# EAGLE board ATTINY Reed switch (EAGLE 7.7.0)
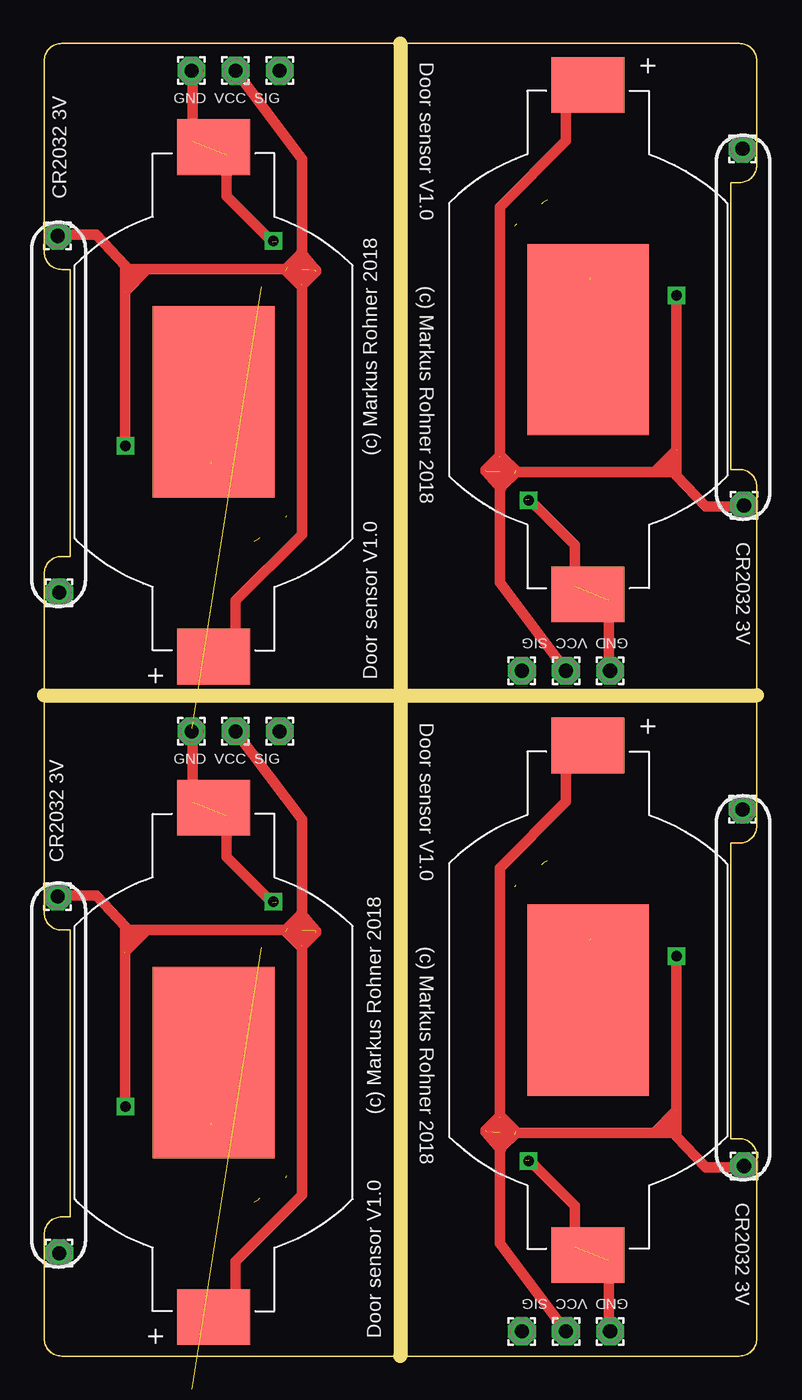
[diagram p0: board, top side]
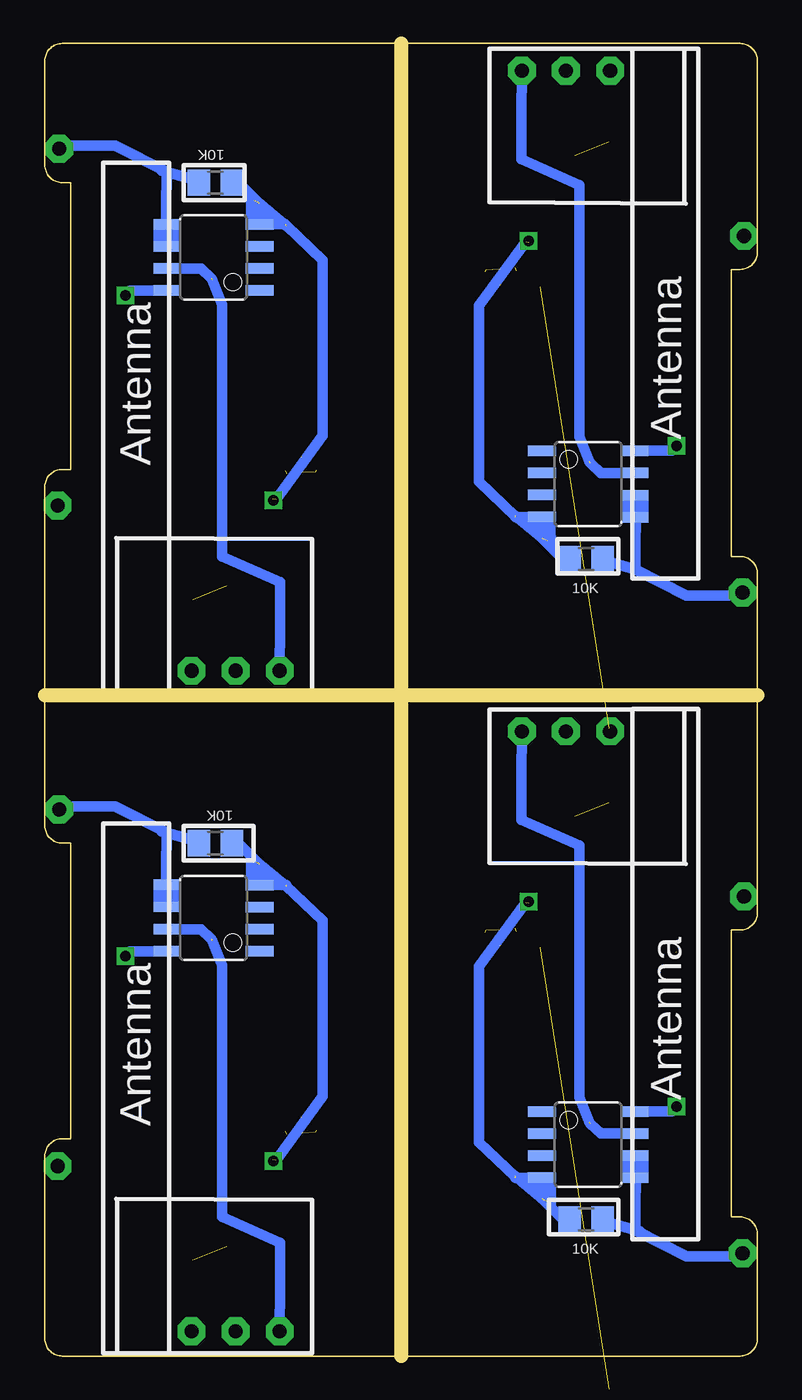
[diagram p1: board, bottom side, seen from below]

Size 41 x 75.5 mm. Coordinates in mm from the lower left corner, seen from the top.
Outline: 0,38 0,45 arc-90 1,46 1.5,46 1.5,62.5 1,62.5 arc-90 0,63.5 0,74.5 arc-90 1,75.5 20.5,75.5
Outline: 0,38 0,25.5 arc90 1,24.5 1.5,24.5 1.5,8 1,8 arc90 0,7 0,1 arc90 1,0 20.5,0
Outline: 20.5,75.5 40,75.5 arc-90 41,74.5 41,68.5 arc-90 40,67.5 39.5,67.5 39.5,51 40,51 arc-90 41,50 41,38
Outline: 41,38 41,30.5 arc-90 40,29.5 39.5,29.5 39.5,12.5 40,12.5 arc-90 41,11.5 41,1 arc-90 40,0 20.5,0
Outline: 0,38 41,38
Outline: 20.5,75.5 20.5,0
Copper layers (1*16): Top 0.035mm / dielectric 1.5mm / Bottom 0.035mm
Design rules "default": minimum track width 10mil, minimum drill 24mil, track to track 8mil, track to pad 8mil, pad to pad 8mil, via to via 8mil, smd to smd 8mil, copper to edge 40mil, drill to drill 8mil, minimum pad ring 10mil, minimum via ring 8mil, stop-mask expansion 4mil, vias tented up to drill 0mil, thermal gap 10mil

## Footprints (pad centres in the part's own frame; a part is rotated, then mirrored left to right if it is on the bottom)
8S1 = smd 0.6 x 1.6: 1 -1.905,-2.654; 2 -0.645,-2.654; 3 0.625,-2.654; 4 1.895,-2.654; 5 1.905,2.654; 6 0.635,2.654; 7 -0.635,2.654; 8 -1.905,2.654
BAT_BU2032SM-BT-GTR = smd 3.2 x 4.2: 1 -14.65,0; 2 14.65,0 | smd 11 x 7: 3 0,0
MK6-8-A = drill 0.6 pad 1.016: 1 -10.16,0; 2 10.16,0
R0805 = smd 1.3 x 1.5: 1 -0.95,0; 2 0.95,0
1,6/0,8 = drill 0.813 pad 1.6 octagon: 1 0,0

## Placement (x,y rotation side)
E$1  [8S1]  9.74,12.16 270 bottom
E$2  [BAT_BU2032SM-BT-GTR]  9.74,16.88 90 top
E$3  [MK6-8-A]  0.83,16.17 90 top
E$4  [R0805]  9.85,7.85 0 bottom
E$5  [1,6/0,8]  13.55,35.93 0 top
E$6  [1,6/0,8]  0.77,26.43 0 top
E$7  [1,6/0,8]  8.47,35.93 0 top
E$8  [1,6/0,8]  11.01,35.93 0 top
E$9  [1,6/0,8]  0.86,5.91 0 top
E$10  [8S1]  31.29,63.2 90 bottom
E$11  [BAT_BU2032SM-BT-GTR]  31.29,58.47 270 top
E$12  [MK6-8-A]  40.21,59.18 270 top
E$13  [R0805]  31.18,67.5 180 bottom
E$14  [1,6/0,8]  32.56,39.42 180 top
E$15  [1,6/0,8]  30.02,39.42 180 top
E$16  [1,6/0,8]  27.48,39.42 180 top
E$17  [1,6/0,8]  40.27,48.92 180 top
E$18  [1,6/0,8]  40.18,69.44 180 top
E$37  [8S1]  9.74,50.16 270 bottom
E$38  [BAT_BU2032SM-BT-GTR]  9.74,54.88 90 top
E$39  [MK6-8-A]  0.83,54.17 90 top
E$40  [R0805]  9.85,45.85 0 bottom
E$41  [1,6/0,8]  8.47,73.93 0 top
E$42  [1,6/0,8]  11.01,73.93 0 top
E$43  [1,6/0,8]  13.55,73.93 0 top
E$44  [1,6/0,8]  0.77,64.43 0 top
E$45  [1,6/0,8]  0.86,43.91 0 top
E$46  [8S1]  31.29,25.2 90 bottom
E$47  [BAT_BU2032SM-BT-GTR]  31.29,20.47 270 top
E$48  [MK6-8-A]  40.21,21.18 270 top
E$49  [R0805]  31.18,29.5 180 bottom
E$50  [1,6/0,8]  32.56,1.42 180 top
E$51  [1,6/0,8]  30.02,1.42 180 top
E$52  [1,6/0,8]  27.48,1.42 180 top
E$53  [1,6/0,8]  40.27,10.92 180 top
E$54  [1,6/0,8]  40.18,31.44 180 top

## Library data of the parts
E$1 E$10 E$37 E$46 = atmel
E$2 E$11 E$38 E$47 = BU2032SM-BT-GTR
E$3 E$12 E$39 E$48 = switch-reed
E$4 E$13 E$40 E$49 = eagle-ltspice
E$5-E$9 E$14-E$18 E$41-E$45 E$50-E$54 = wirepad

## Nets
S$14: E$5.1
S$24: E$16.1
S$69: E$43.1
S$84: E$52.1
VCC: E$8.1
VCC1: E$15.1
VCC4: E$42.1
VCC5: E$51.1

## Tracks (layer width: path | path; a pad name or v marks a point on that pad's centre or on a via)
GND  (7 unrouted)
  Top 0.61: 13.13,26.06 10.49,28.7 10.49,31.07 | 8.51,36.09 8.55,36.05 8.55,31.85
  Bottom 0.406: 12.02,10.16 12.08,10.16 12.08,8.87 11.82,8.87 11.82,10.39 11.81,10.39 11.81,8.53
  Bottom 0.61: 11.17,7.83 12.41,9.06 12.41,10.2 | 13.93,10.3 16.01,12.3 16.01,22.41 13.33,26.1 | 13.95,10.35 12.31,8.99 13.07,10.15 | 12.61,10.26 13.91,10.26
GND1  (6 unrouted)
  Top 0.61: 27.9,49.29 30.55,46.65 30.55,44.28 | 32.53,39.26 32.48,39.31 32.48,43.5
  Bottom 0.406: 29.02,65.19 28.96,65.19 28.96,66.49 29.21,66.49 29.21,65.01 29.23,65.02 29.23,66.83
  Bottom 0.61: 29.87,67.53 28.63,66.29 28.63,65.16 | 27.11,65.06 25.02,63.05 25.02,52.95 27.71,49.26 | 27.09,65 28.73,66.36 27.96,65.2 | 28.43,65.1 27.18,65.09
GND2  (1 unrouted)
GND4  (6 unrouted)
  Top 0.61: 13.13,64.06 10.49,66.7 10.49,69.07 | 8.51,74.09 8.55,74.05 8.55,69.85
  Bottom 0.406: 12.02,48.16 12.08,48.16 12.08,46.87 11.82,46.87 11.8,48.25 11.81,47.87 11.81,46.52
  Bottom 0.61: 11.17,45.83 12.41,47.06 12.41,48.2 | 13.93,48.3 16.01,50.3 16.01,60.41 13.33,64.1 | 13.95,48.35 12.31,46.99 13.07,48.15 | 12.61,48.26 13.91,48.26
GND5  (6 unrouted)
  Top 0.61: 27.9,11.29 30.55,8.65 30.55,6.28 | 32.53,1.26 32.48,1.31 32.48,5.5
  Bottom 0.406: 29.02,27.19 28.96,27.19 28.96,28.49 29.21,28.49 29.21,26.97 29.23,26.97 29.23,28.83
  Bottom 0.61: 29.87,29.53 28.63,28.29 28.63,27.16 | 27.11,27.05 25.02,25.05 25.02,14.95 27.71,11.26 | 27.09,27 28.73,28.36 27.96,27.2 | 28.43,27.1 27.12,27.1
S$1
  Bottom 0.61: 6.83,11.52 6.95,11.4 6.95,10.27 6.95,10.28
S$2
  Top 0.61: 32.23,43.64 32.02,43.44
S$3
  Bottom 0.61: 6.77,7.17 8.93,7.77
S$4
  Bottom 0.61: 0.91,5.73 4.1,5.73 7.03,7.23 7,11.47 7.38,11.51
S$5
  Top 0.61: 32.58,44.35 32.4,44.17
S$6
  Top 0.61: 8.73,2.53 10.64,2.53 10.97,2.86
S$7
  Top 0.61: 32.31,72.97 32.11,72.77
S$8
  Top 0.61: 10.87,2.87 10.53,2.65 10.79,2.92
S$9
  Bottom 0.406: 6.72,14.1 6.72,14.08
S$10
  Bottom 0.61: 34.2,63.84 34.08,63.95 34.08,65.09 34.09,65.07
S$11  (via drill 0.6)
  other vias: 13.17,26.14
S$12
  Bottom 0.61: 40.13,69.62 36.94,69.62 34,68.13 34.04,63.88 33.65,63.84
S$13
  Top 0.61: 6.02,24.52 4.92,24.52 4.92,24.06
S$14  (1 unrouted)
  Bottom 0.61: 9.66,13.45 10.23,14.88 10.25,29.36 13.57,30.83 13.57,33.37 E$5.1 | 7.73,12.8 9.02,12.8 9.6,13.35
S$15
  Top 0.61: 32.3,72.83 30.4,72.83 30.07,72.49
S$16
  Top 0.61: 15.65,24.46 15.04,24.46
S$17
  Top 0.61: 8.81,31.71 9.02,31.91
S$18
  Top 0.61: 5.47,24.47 4.85,24.47 4.82,24.45
S$19
  Top 0.61: 8.72,2.38 8.92,2.58
S$20
  Top 0.61: 8.45,31 8.64,31.18
S$21
  Bottom 0.406: 6.49,11.52 6.49,10.23 7.44,10.23 7.44,11.44 7.63,11.44 7.63,10.16
S$22
  Top 0.61: 30.17,72.48 30.51,72.7 30.24,72.44
S$23
  Bottom 0.406: 34.32,61.26 34.32,61.27
S$24  (1 unrouted)
  Bottom 0.61: 31.37,61.9 30.8,60.47 30.79,45.99 27.46,44.52 27.46,41.98 E$16.1 | 33.3,62.55 32.02,62.55 31.44,62
S$25
  Top 0.61: 25.38,50.9 25.99,50.9
S$26
  Bottom 0.61: 34.27,68.19 32.11,67.58
S$27
  Top 0.61: 35.02,50.84 36.12,50.84 36.12,51.29
S$28
  Top 0.61: 35.57,50.88 36.19,50.88 36.21,50.91
S$29  (via drill 0.6)
  other vias: 27.86,49.22
S$30
  Bottom 0.406: 34.55,63.83 34.55,65.12 33.59,65.12 33.59,63.91 33.41,63.91 33.41,65.19
S$61
  Top 0.61: 8.81,69.71 9.02,69.92
S$62
  Top 0.61: 8.45,69 8.64,69.18
S$63
  Top 0.61: 8.72,40.38 8.92,40.58
S$64
  Bottom 0.61: 6.83,49.52 6.95,49.4 6.95,48.27 6.95,48.28
S$65
  Bottom 0.61: 0.91,43.73 4.1,43.73 7.03,45.23 7,49.47 7.38,49.51
S$66
  Top 0.61: 8.73,40.53 10.64,40.53 10.97,40.86
S$67
  Top 0.61: 10.87,40.87 10.53,40.65 10.79,40.91
S$68
  Bottom 0.406: 6.72,52.09 6.72,52.08
S$69  (1 unrouted)
  Bottom 0.61: 9.66,51.45 10.23,52.88 10.25,67.36 13.57,68.83 13.57,71.37 E$43.1 | 7.73,50.8 9.02,50.8 9.6,51.35
S$70
  Top 0.61: 15.65,62.46 15.04,62.46
S$71
  Bottom 0.61: 7,45.25 8.93,45.77
S$72
  Top 0.61: 6.02,62.52 4.92,62.52 4.92,62.06
S$73
  Top 0.61: 5.47,62.47 4.85,62.47 4.82,62.45
S$74  (via drill 0.6)
  other vias: 13.17,64.14
S$75
  Bottom 0.406: 6.49,49.52 6.49,48.23 7.44,48.23 7.44,49.44 7.63,49.44 7.63,48.16
S$76
  Top 0.61: 32.23,5.64 32.02,5.44
S$77
  Top 0.61: 32.58,6.35 32.4,6.17
S$78
  Top 0.61: 32.31,34.97 32.11,34.77
S$79
  Bottom 0.61: 34.2,25.84 34.08,25.95 34.08,27.09 34.09,27.07
S$80
  Bottom 0.61: 40.13,31.62 36.94,31.62 34,30.13 34.04,25.88 33.65,25.84
S$81
  Top 0.61: 32.3,34.83 30.4,34.83 30.07,34.49
S$82
  Top 0.61: 30.17,34.48 30.51,34.7 30.24,34.44
S$83
  Bottom 0.406: 34.32,23.26 34.32,23.27
S$84  (1 unrouted)
  Bottom 0.61: 31.37,23.9 30.8,22.47 30.79,7.99 27.46,6.52 27.46,3.98 E$52.1 | 33.3,24.55 32.02,24.55 31.44,24
S$85
  Top 0.61: 25.38,12.9 25.99,12.9
S$86
  Bottom 0.61: 34.27,30.19 32.11,29.58
S$87
  Top 0.61: 35.02,12.84 36.12,12.84 36.12,13.29
S$88
  Top 0.61: 35.57,12.88 36.19,12.88 36.21,12.91
S$89  (via drill 0.6)
  other vias: 27.86,11.22
S$90
  Bottom 0.406: 34.55,25.83 34.55,27.12 33.59,27.12 33.59,25.91 33.41,25.91 33.41,27.19
VCC  (via drill 0.6)  (5 unrouted)
  Top 0.61: 11.01,2.91 11.01,5.45 14.82,9.26 14.82,24.5 | 14.82,24.5 14.82,30.85 E$8.1 | 14.82,24.5 5.93,24.5 4.66,23.23 v4.66,14.34 | 4.66,23.21 4.66,24.72 2.98,26.5 0.57,26.5 | 14.77,25.46 15.61,24.47 | 15.64,24.38 14.86,23.6 14.82,23.6 | 13.9,24.43 14.69,23.63 14.8,23.63 | 13.96,24.59 14.66,25.29 14.86,25.29
  Bottom 0.61: v4.66,14.34 4.93,14.07 7.44,14.07
VCC1  (via drill 0.6)  (5 unrouted)
  Top 0.61: 30.02,72.44 30.02,69.9 26.21,66.09 26.21,50.85 | 26.21,50.85 26.21,44.5 E$15.1 | 26.21,50.85 35.1,50.85 36.37,52.12 v36.37,61.01 | 36.38,52.14 36.38,50.64 38.06,48.86 40.47,48.86 | 26.27,49.89 25.43,50.88 | 25.4,50.97 26.17,51.75 26.22,51.75 | 27.14,50.93 26.34,51.72 26.24,51.72 | 27.07,50.76 26.37,50.06 26.18,50.06
  Bottom 0.61: v36.37,61.01 36.1,61.28 33.6,61.28
VCC4  (via drill 0.6)  (5 unrouted)
  Top 0.61: 11.01,40.91 11.01,43.45 14.82,47.26 14.82,62.5 | 14.82,62.5 14.82,68.85 E$42.1 | 14.82,62.5 5.93,62.5 4.66,61.23 v4.66,52.34 | 4.66,61.21 4.66,62.72 2.98,64.5 0.57,64.5 | 14.77,63.46 15.61,62.47 | 15.64,62.38 14.86,61.6 14.82,61.6 | 13.9,62.42 14.69,61.63 14.8,61.63 | 13.96,62.59 14.66,63.29 14.86,63.29
  Bottom 0.61: v4.66,52.34 4.93,52.07 7.44,52.07
VCC5  (via drill 0.6)  (5 unrouted)
  Top 0.61: 30.02,34.44 30.02,31.9 26.21,28.09 26.21,12.85 | 26.21,12.85 26.21,6.5 E$51.1 | 26.21,12.85 35.1,12.85 36.37,14.12 v36.37,23.01 | 36.38,14.14 36.38,12.64 38.06,10.86 40.47,10.86 | 26.27,11.89 25.43,12.88 | 25.4,12.97 26.17,13.75 26.22,13.75 | 27.14,12.93 26.34,13.72 26.24,13.72 | 27.07,12.76 26.37,12.06 26.18,12.06
  Bottom 0.61: v36.37,23.01 36.1,23.28 33.6,23.28

## Text on the board
tNames: Door sensor V1.0 (c) Markus Rohner 2018 | GND VCC SIG | CR2032 3V | CR2032 3V | GND VCC SIG | Door sensor V1.0 (c) Markus Rohner 2018 | Door sensor V1.0 (c) Markus Rohner 2018 | GND VCC SIG | CR2032 3V | CR2032 3V | GND VCC SIG | Door sensor V1.0 (c) Markus Rohner 2018
bNames: 10K | Antenna | Antenna | 10K | 10K | Antenna | Antenna | 10K